# Altium PCB PCB1.PcbDoc
Units mil, origin at the board's own origin, x right, y up, seen from the top; angles counter-clockwise.
Board outline 2575 x 3510 mil, 2 copper layers (Top Layer, Bottom Layer); 43 components, 55 nets, 189 pads, 0 vias.
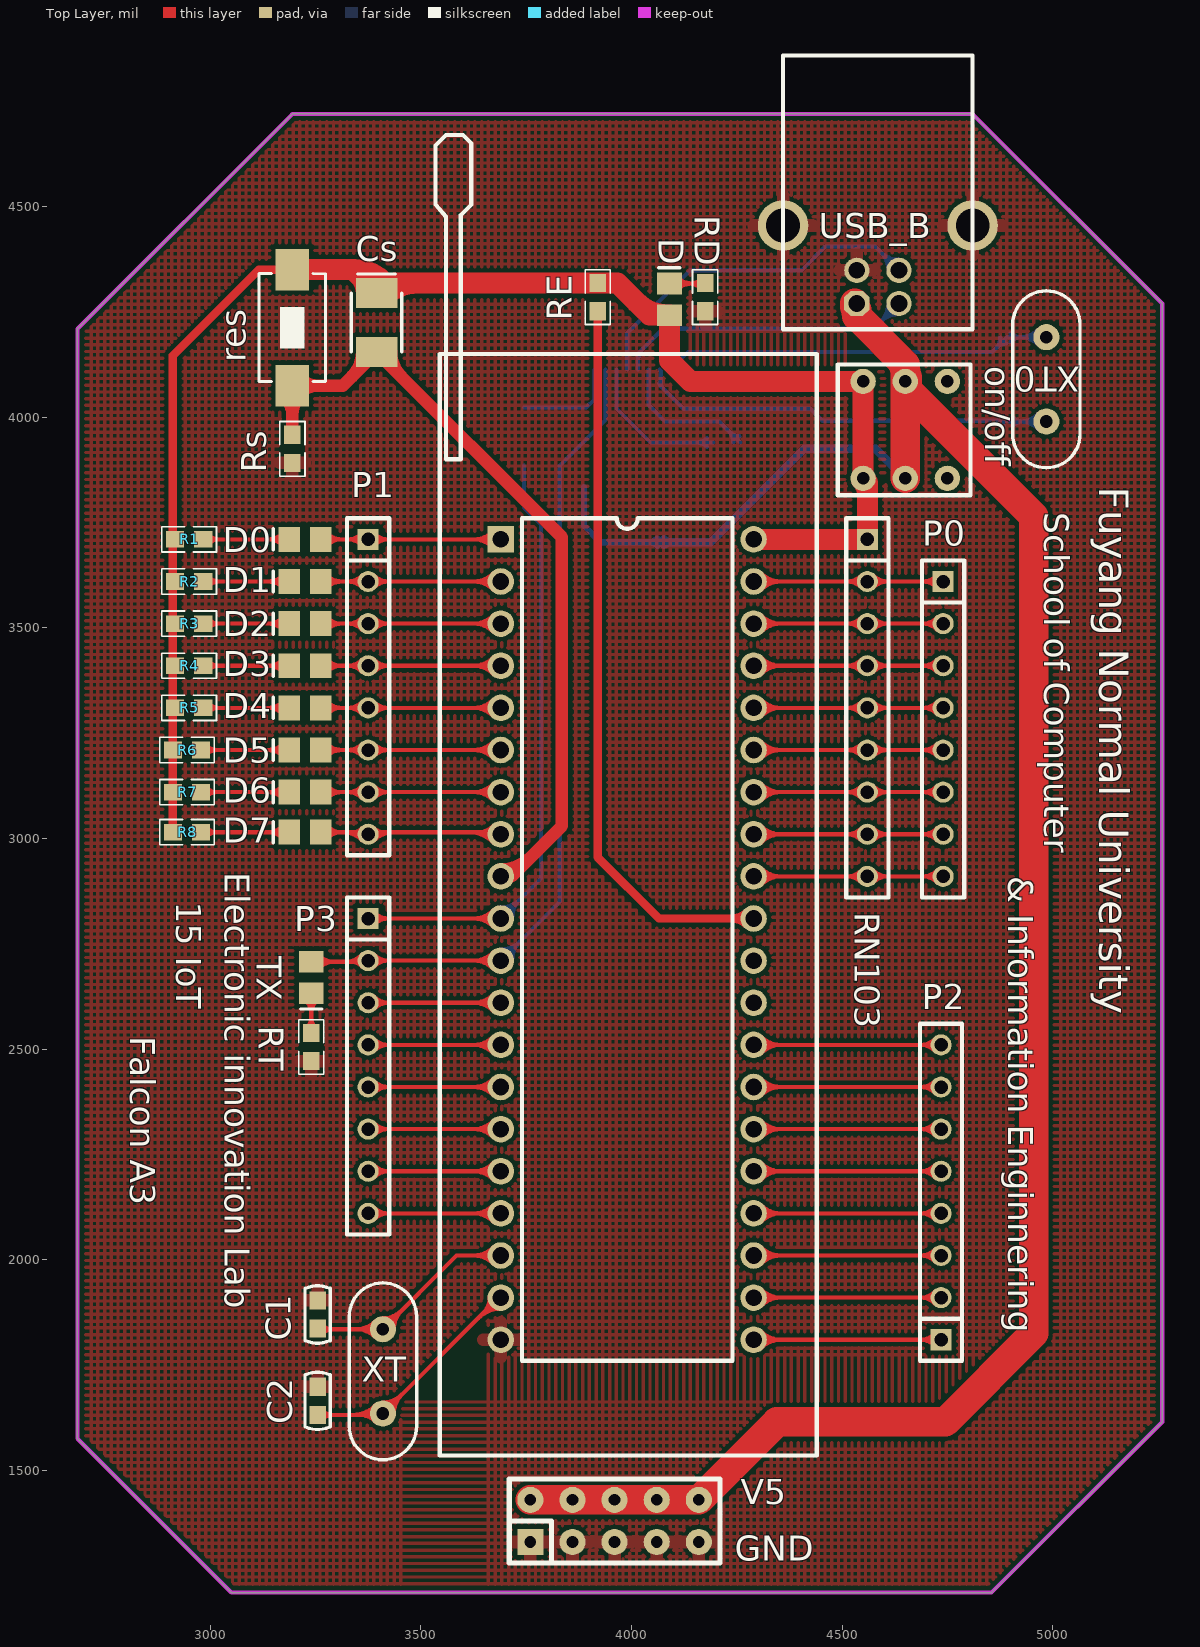
[diagram p0: Top Layer view]
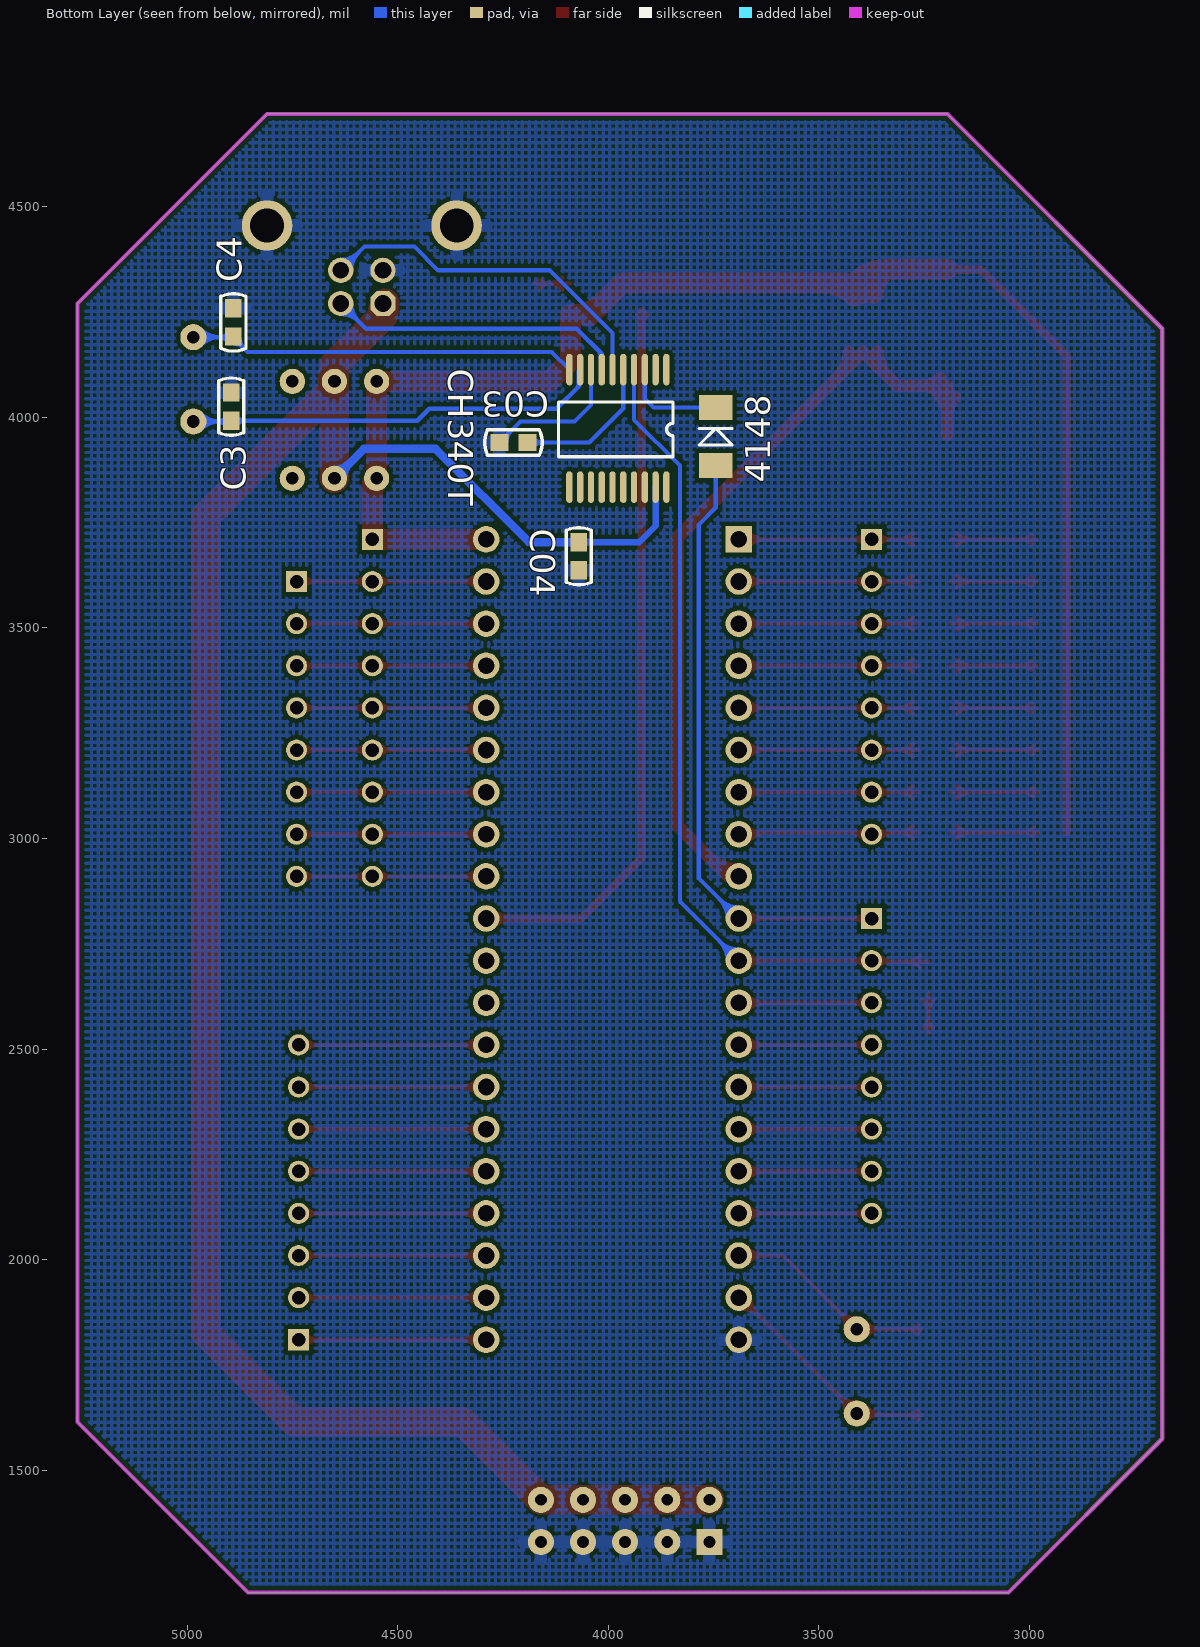
[diagram p1: Bottom Layer view, seen from below]

## Layer stack, top to bottom
Top Layer: signal copper 1.4
Dielectric: dielectric 12.6, FR-4, Dk 4.8
Bottom Layer: signal copper 1.4

## Board outline
2685,1575 2685,4210 3195,4720 4810,4720 5260,4270 5260,1615 4855,1210 3050,1210

## Design rules (kind name [scope] priority, off if disabled: settings)
Clearance [All] p1: gap=10
ComponentClearance [All] p1: gap=0 collisioncheckmode=3 verticalgap=0 showdistances=FALSE
PlaneConnect [All] p1: planeconnectstyle=Relief reliefexpansion=20 reliefentries=4 reliefconductorwidth=30 reliefairgap=10
PolygonConnect [All] p1: connectstyle=Relief reliefconductorwidth=30 reliefentries=4 polygonreliefangle="90 Angle" airgapwidth=10
RoutingVias [All] p1: holewidth=28 width=50 viastyle="Through Hole" minholewidth=28 minwidth=50 maxholewidth=28 maxwidth=50
SolderMaskExpansion [All] p1: expansion=4
Width [All] p1: maxlimit=100 minlimit=10 preferedwidth=10
26 further rules are at their usual default settings.

## Classes and differential pairs
component class Sheet1: C1 C2 C3 C03 C4 C04 CH340T Cs D D0 D1 D2 D3 D4 D5 D6 D7 on/off P0 P1 P2 P3 R1 R2 R3 R4 R5 R6 R7 R8 RD RE res RN103 Rs RT

## Components (designator, comment, footprint, x,y, rotation, side; value= is the part's Value field where it differs from the comment)
4148 "Comment" DIODE-1206 3745,3885 r90 bottom
C1 "Cap" C-RAD-0603 3255,1870 r90 top
C2 "Cap" C-RAD-0603 3255,1665 r270 top
C03 "Cap" C-RAD-0603 4225,3940 r180 bottom
C3 "Cap" C-RAD-0603 4895,4025 r90 bottom
C04 "Cap" C-RAD-0603 4070,3670 r90 bottom
C4 "Cap" C-RAD-0603 4890,4225 r90 bottom
CH340T "CH340H" SSOP20 3945,3940 r270 bottom
Cs "Cap Pol" CAP-3528 3395,4225 r270 top
D "LED0" LED_0805 4090,4280 r90 top
D0 "LED0" LED_0805 3225,3710 r180 top
D1 "LED0" LED_0805 3225,3610 r180 top
D2 "LED0" LED_0805 3225,3510 r180 top
D3 "LED0" LED_0805 3225,3410 r180 top
D4 "LED0" LED_0805 3225,3310 r180 top
D5 "LED0" LED_0805 3225,3210 r180 top
D6 "LED0" LED_0805 3225,3110 r180 top
D7 "LED0" LED_0805 3225,3015 r180 top
on/off "HEADER 3X2" 自锁按键 4555,4085 r270 top
P0 "Header 8" SIP8 4740,3610 r270 top
P1 "Header 8" SIP8 3375,3710 r270 top
P2 "Header 8" SIP8 4735,1810 r90 top
P3 "Header 8" SIP8 3375,2810 r270 top
R1 "Res1" 0603-1 2950,3710 r180 top
R2 "Res1" 0603-1 2950,3610 r180 top
R3 "Res1" 0603-1 2950,3510 r180 top
R4 "Res1" 0603-1 2950,3410 r180 top
R5 "Res1" 0603-1 2950,3310 r180 top
R6 "Res1" 0603-1 2945,3210 r180 top
R7 "Res1" 0603-1 2945,3110 r180 top
R8 "Res1" 0603-1 2945,3015 r180 top
RD "Res1" 0603-1 4175,4285 r270 top
RE "Res1" 0603-1 3920,4285 r90 top
res "SW-PB" SW_PB2_A1 3195,4215 r180 top
RN103 "CON9" SIP9 4560,3710 r270 top
Rs "Res1" 0603-1 3195,3925 r90 top
RT "Res1" 0603-1 3240,2505 r270 top
TX "LED0" LED_0805 3240,2670 r270 top
USB_B "USB" USB_B1 4535,4270 r90 top
V5 "Comment" IDC10 3760,1330 r0 top
XT "XT" HC-49S 3410,1635 r90 top
XT0 "XT" HC-49S 4985,4190 r270 top
? "89C52" DIP40Plv 4290,1810 r90 top

## Footprints (in the part's own frame and the unit in brackets; to place one, negate y for a bottom-side part, rotate by r counter-clockwise, add the part's x,y. Pads: shape width x height; smd on the part's side, far side on the other; paste and mask are expansions set on the pad)
0603-1 [mm] "贴片带丝印"
  rect 1.1x1 smd: 1(-0.85,0) 2(0.85,0)
  silkscreen extent -1.65,-0.76 1.65,0.76, body extent -1.14,-0.38 1.14,0.38, height 1
C-RAD-0603 [mm] "贴片电容"
  rect 1.1x1 smd: 1(-0.85,0) 2(0.85,0)
  silkscreen extent -1.73,-0.76 1.73,0.76, body extent -1.14,-0.38 1.14,0.38, height 1
CAP-3528 [mm] "钽电容"
  rect 1.8x2.5 smd: 1(-1.778,0) 2(1.778,0)
  silkscreen extent -2.92,-1.52 1.78,1.52, body extent -1.91,-1.4 1.91,1.4, height 1.1
DIODE-1206 [mm] "玻璃封装二极管"
  rect 1.5x2 smd: 1(0,0) 2(3.5,0)
  silkscreen extent 1.25,-1 2.25,1
DIP40Plv [mm]
  rect 1.6x1.6 hole 1: 1(48.26,15.24)
  round 1.6 hole 1: 2(45.72,15.24) 3(43.18,15.24) 4(40.64,15.24) 5(38.1,15.24) 6(35.56,15.24) 7(33.02,15.24) 8(30.48,15.24) 9(27.94,15.24) 10(25.4,15.24) 11(22.86,15.24) 12(20.32,15.24) 13(17.78,15.24) 14(15.24,15.24) 15(12.7,15.24) 16(10.16,15.24) 17(7.62,15.24) 18(5.08,15.24) 19(2.54,15.24) 20(0,15.24) 21(0,0) 22(2.54,0) 23(5.08,0) 24(7.62,0) 25(10.16,0) 26(12.7,0) 27(15.24,0) 28(17.78,0) 29(20.32,0) 30(22.86,0) 31(25.4,0) 32(27.94,0) 33(30.48,0) 34(33.02,0) 35(35.56,0) 36(38.1,0) 37(40.64,0) 38(43.18,0) 39(45.72,0) 40(48.26,0)
  silkscreen extent -6.99,-3.81 72.64,19.18
HC-49S [mil]
  round 62 hole 30: 1(0,0) 2(200,0)
  silkscreen extent -110,-80 310,80
IDC10 [mil]
  rect 62x62 hole 28: 1(0,0)
  round 62 hole 28: 2(0,100) 3(100,0) 4(100,100) 5(200,0) 6(200,100) 7(300,0) 8(300,100) 9(400,0) 10(400,100)
  silkscreen extent -50,-50 450,150
LED_0805 [mm] "贴片二极管"
  rect 1.3x1.5 smd: 1(-0.95,0) 2(0.95,0)
  silkscreen extent 1.91,-0.63 1.91,0.64
SIP8 [mil]
  rect 50x50 hole 32: 1(0,0)
  round 50 hole 32: 2(100,0) 3(200,0) 4(300,0) 5(400,0) 6(500,0) 7(600,0) 8(700,0)
  silkscreen extent -50,-50 750,50
SIP9 [mil]
  rect 50x50 hole 32: 1(0,0)
  round 50 hole 32: 2(100,0) 3(200,0) 4(300,0) 5(400,0) 6(500,0) 7(600,0) 8(700,0) 9(800,0)
  silkscreen extent -50,-50 850,50
SSOP20 [mil]
  oval 75x14.96 smd: 1(-173,83) 2(-173,57.41) 3(-173,31.82) 4(-173,6.23) 5(-173,-19.36) 6(-173,-44.95) 7(-173,-70.54) 8(-173,-96.14) 9(-173,-121.72) 10(-173,-147.32) 11(106,-147.32) 12(106,-121.72) 13(106,-96.14) 14(106,-70.54) 15(106,-44.95) 16(106,-19.36) 17(106,6.23) 18(106,31.82) 19(106,57.41) 20(106,83)
  silkscreen extent -96,-173 34,99
SW_PB2_A1 [mm]
  rect 2x2.5 smd: 1(0,3.556) 2(0,-3.444)
  silkscreen extent -2,-3.19 2,3.31, body extent -2.03,-3.18 2.03,3.3, height 1.2
USB_B1 [mil] "USB方孔"
  oct 60x60 hole 40: 1(0,0)
  round 60 hole 40: 2(0,-100) 3(78.74,-100) 4(78.74,0)
  round 120 hole 80: 5(185.04,175) 6(185.04,-275)
  silkscreen extent -61,-275 589,175
自锁按键 [mil]
  round 60 hole 30: 0(0,195) 0(230,195) 1(0,95) 1(230,95) 2(0,-5) 2(230,-5)
  silkscreen extent -40,-65 270,250

## Part data
C1 C2 C03 C3 C04 C4: "无极性电容"
CH340T: "USB to TTL Serial / UART,  USB to IrDA"
Cs: "极性电解电容"
D D0 D1 D2 D3 D4 D5 D6 D7 TX: "发光二极管"
P0 P1 P2 P3: "Header, 8-Pin"
R1 R2 R3 R4 R5 R6 R7 R8 RD RE Rs RT: "贴片电阻"
res: "微动开关"
RN103: "Connector"
USB_B: "USB接口"
XT XT0: "晶振"

## Nets (pads, with @x,y where several pads share a name; then routed paths per layer and width w, separated by ;. In a path a pad name is that pad's centre, name@x,y a point inside that pad or via, vN(x,y) a via of type N, cw(c..) or ccw(c..) an arc to the next point about the centre after c; other vN are vias at no path point)
D+: CH340T.6 USB_B.3 | length 991.9
  Bottom Layer w10: CH340T.6 3989.95,4199.95 4138.74,4348.74 4403.74,4348.74 4460,4405 4578.74,4405 USB_B.3 ; USB_B.3@4610,4348.74 ccw(c4549.64,4348.74) 4592.32,4391.42 ccw(c4635,4434.1) USB_B.3@4635,4373.74 ; USB_B.3@4620,4348.74 ccw(c4583.79,4348.74) 4609.39,4374.35 ccw(c4635,4399.95) USB_B.3@4635,4363.74
D-: CH340T.7 USB_B.2 | length 877.1
  Bottom Layer w10: CH340T.7 4015.54,4150.54 4075,4210 4575,4210 USB_B.2 ; CH340T.7@4018.02,4143.02 cw(c4042.18,4143.02) 4025.1,4160.1 ; USB_B.2@4610,4270 cw(c4549.64,4270) 4592.32,4227.32 cw(c4635,4184.64) USB_B.2@4635,4245 ; USB_B.2@4620,4270 cw(c4583.79,4270) 4609.39,4244.39 cw(c4635,4218.79) USB_B.2@4635,4255
GND: ?.20 C1.2 C2.1 C03.1 C3.2 C04.1 C4.2 CH340T.8 RD.2 Rs.1 RT.2 USB_B.4 USB_B.5 USB_B.6 V5.1 V5.3 V5.5 V5.7 V5.9 | length 394
  Bottom Layer w10: CH340T.8 4041.14,4028.86 4080,3990 4208.46,3990 C03.1 ; 4230.04,3968.43 cw(c4201.61,3940) C03.1@4241.81,3940 ; 4234.79,3963.68 ccw(c4256.5,3985.39) C03.1@4256.5,3954.68
Net_9: ?.9 Cs.2 res.1 Rs.2 | length 2244.9
  Top Layer w30: res.1@3177.77,4047.93 cw(c3136.17,4006.32) 3195,4006.32 cw(c3253.83,4006.32) res.1@3212.23,4047.93 ; Rs.2 res.1 3315,4075 Cs.2 3835,3715 3835,3030 3715,2910 ?.9 ; res.1@3212.23,4057.77 cw(c3253.83,4016.17) 3253.83,4075 cw(c3253.83,4133.83) res.1@3212.23,4092.23 ; 3336.6,4096.6 ccw(c3278.19,4155) Cs.2@3360.79,4155 ; Cs.2@3429.21,4155 ccw(c3511.81,4155) 3453.4,4096.6 ; ?.9@3690,2926.5 ccw(c3690,3026.68) 3760.84,2955.84
Net_18: ?.18 C1.1 XT.2 | length 1043.2
  Top Layer w10: C1.1@3256.54,1835 XT.2 3585,2010 ?.18 ; C1.1@3265.38,1824.18 cw(c3291.5,1798.07) 3291.5,1835 ; C1.1@3265.38,1844.95 ccw(c3289.41,1868.97) 3289.41,1835 ; XT.2@3391.62,1816.62 ccw(c3347.23,1772.23) 3347.23,1835 ccw(c3347.23,1897.77) XT.2@3391.62,1853.38 ; XT.2@3398.69,1823.69 ccw(c3371.37,1796.37) 3371.37,1835 ccw(c3371.37,1873.63) XT.2@3398.69,1846.31 ; XT.2@3410,1851 ccw(c3410,1889.63) 3437.31,1862.31 ccw(c3464.63,1835) XT.2@3426,1835 ; XT.2@3410,1861 ccw(c3410,1923.77) 3454.38,1879.38 ccw(c3498.77,1835) XT.2@3436,1835 ; ?.18@3671.26,1991.26 ccw(c3626.03,1946.03) 3626.03,2010 ccw(c3626.03,2073.97) ?.18@3671.26,2028.74 ; ?.18@3678.34,1998.34 ccw(c3650.18,1970.18) 3650.18,2010 ccw(c3650.18,2049.82) ?.18@3678.34,2021.66
Net_19: ?.19 C2.2 XT.1 | length 1039.9
  Top Layer w10: C2.2 XT.1@3406.54,1631.54 ; C2.2@3265.38,1621.15 cw(c3290.45,1596.08) 3290.45,1631.54 cw(c3290.45,1666.99) C2.2@3265.38,1641.92 ; 3338.87,1631.54 ccw(c3338.87,1706.13) XT.1@3391.62,1653.38 ; 3355.59,1631.54 cw(c3355.59,1580.59) XT.1@3391.62,1616.62 ; 3363.01,1631.54 ccw(c3363.01,1681.99) XT.1@3398.69,1646.31 ; XT.1 3685,1910 ?.19 ; XT.1@3410,1651 ccw(c3410,1689.63) 3437.31,1662.31 ccw(c3464.63,1635) XT.1@3426,1635 ; XT.1@3410,1661 ccw(c3410,1723.77) 3454.38,1679.38 ccw(c3498.77,1635) XT.1@3436,1635 ; 3636.23,1861.23 cw(c3690,1807.47) ?.19@3690,1883.5 ; 3648.3,1873.3 ccw(c3611.61,1910) ?.19@3663.5,1910 ; 3653.3,1878.3 cw(c3690,1841.61) ?.19@3690,1893.5
Net_31: ?.31 RE.1 | length 1844.8
  Top Layer w20: RE.1@3913.15,4242.72 cw(c3896.62,4226.19) 3920,4226.19 cw(c3943.38,4226.19) RE.1@3926.85,4242.72 ; RE.1 3920,2955 4065,2810 ?.31 ; ?.31@4274.8,2794.8 ccw(c4238.1,2758.1) 4238.1,2810 ccw(c4238.1,2861.9) ?.31@4274.8,2825.2
NetC3_1: C3.1 CH340T.9 XT0.2 | length 1293.4
  Bottom Layer w10: CH340T.9@4065.46,4080.85 cw(c4060.9,4073.16) 4069.84,4073.16 ; CH340T.9 4069.84,4109.89 4069.84,4073.67 ; CH340T.9@4068.85,4081.7 ccw(c4074.48,4078.32) 4069.84,4073.67 ; CH340T.9@4069.21,4082.98 ccw(c4090.17,4082.98) 4075.34,4068.16 ; C3.1@4884.62,3981.15 ccw(c4859.55,3956.08) 4859.55,3991.54 ccw(c4859.55,4026.99) C3.1@4884.62,4001.92 ; C3.1 4453.46,3991.54 4425,4020 4123.5,4020 4069.84,4073.67 ; C3.1@4896.54,3990 XT0.2 ; C3.1@4905.38,3979.18 cw(c4931.5,3953.07) 4931.5,3990 ; C3.1@4905.38,3999.95 ccw(c4929.41,4023.97) 4929.41,3990 ; XT0.2@4966.62,3971.62 ccw(c4922.23,3927.23) 4922.23,3990 ccw(c4922.23,4052.77) XT0.2@4966.62,4008.38 ; XT0.2@4973.69,3978.69 ccw(c4946.37,3951.37) 4946.37,3990 ccw(c4946.37,4028.63) XT0.2@4973.69,4001.31
NetC03_2: C03.2 CH340T.5 | length 412.1
  Bottom Layer w10: CH340T.5 3964.36,4020.64 4045,3940 C03.2@4195,3940 ; C03.2@4179.18,3929.62 ccw(c4154.11,3904.55) 4154.11,3940 ccw(c4154.11,3975.45) C03.2@4179.18,3950.38
NetC4_1: C4.1 CH340T.10 XT0.1 | length 1195.2
  Bottom Layer w10: CH340T.10 4134.32,4155 4856.54,4155 4891.54,4190 XT0.1 ; 4864.15,4162.62 ccw(c4837.2,4189.57) C4.1@4875.32,4189.57 ; 4866.81,4165.28 cw(c4890,4142.09) C4.1@4890,4174.88 ; C4.1@4900.38,4179.18 cw(c4926.5,4153.07) 4926.5,4190 ; C4.1@4900.38,4199.95 ccw(c4924.41,4223.97) 4924.41,4190 ; XT0.1@4966.62,4171.62 ccw(c4922.23,4127.23) 4922.23,4190 ccw(c4922.23,4252.77) XT0.1@4966.62,4208.38 ; XT0.1@4973.69,4178.69 ccw(c4946.37,4151.37) 4946.37,4190 ccw(c4946.37,4228.63) XT0.1@4973.69,4201.31
NetD0_2: D0.2 R1.1 | length 337.9
  Top Layer w10: R1.1 D0.2 ; R1.1@2995.82,3699.62 cw(c3020.89,3674.55) 3020.89,3710 cw(c3020.89,3745.45) R1.1@2995.82,3720.38 ; D0.2@3173.04,3695.44 ccw(c3137.89,3660.29) 3137.89,3710 ccw(c3137.89,3759.71) D0.2@3173.04,3724.56
NetD1_2: D1.2 R2.1 | length 337.9
  Top Layer w10: R2.1 D1.2 ; R2.1@2995.82,3599.62 cw(c3020.89,3574.55) 3020.89,3610 cw(c3020.89,3645.45) R2.1@2995.82,3620.38 ; D1.2@3173.04,3595.44 ccw(c3137.89,3560.29) 3137.89,3610 ccw(c3137.89,3659.71) D1.2@3173.04,3624.56
NetD2_2: D2.2 R3.1 | length 337.9
  Top Layer w10: R3.1 D2.2 ; R3.1@2995.82,3499.62 cw(c3020.89,3474.55) 3020.89,3510 cw(c3020.89,3545.45) R3.1@2995.82,3520.38 ; D2.2@3173.04,3495.44 ccw(c3137.89,3460.29) 3137.89,3510 ccw(c3137.89,3559.71) D2.2@3173.04,3524.56
NetD3_2: D3.2 R4.1 | length 337.9
  Top Layer w10: R4.1 D3.2 ; R4.1@2995.82,3399.62 cw(c3020.89,3374.55) 3020.89,3410 cw(c3020.89,3445.45) R4.1@2995.82,3420.38 ; D3.2@3173.04,3395.44 ccw(c3137.89,3360.29) 3137.89,3410 ccw(c3137.89,3459.71) D3.2@3173.04,3424.56
NetD4_2: D4.2 R5.1 | length 337.9
  Top Layer w10: R5.1 D4.2 ; R5.1@2995.82,3299.62 cw(c3020.89,3274.55) 3020.89,3310 cw(c3020.89,3345.45) R5.1@2995.82,3320.38 ; D4.2@3173.04,3295.44 ccw(c3137.89,3260.29) 3137.89,3310 ccw(c3137.89,3359.71) D4.2@3173.04,3324.56
NetD5_2: D5.2 R6.1 | length 342.9
  Top Layer w10: R6.1 D5.2 ; R6.1@2990.82,3199.62 cw(c3015.89,3174.55) 3015.89,3210 cw(c3015.89,3245.45) R6.1@2990.82,3220.38 ; D5.2@3173.04,3195.44 ccw(c3137.89,3160.29) 3137.89,3210 ccw(c3137.89,3259.71) D5.2@3173.04,3224.56
NetD6_2: D6.2 R7.1 | length 342.9
  Top Layer w10: R7.1 D6.2 ; R7.1@2990.82,3099.62 cw(c3015.89,3074.55) 3015.89,3110 cw(c3015.89,3145.45) R7.1@2990.82,3120.38 ; D6.2@3173.04,3095.44 ccw(c3137.89,3060.29) 3137.89,3110 ccw(c3137.89,3159.71) D6.2@3173.04,3124.56
NetD7_2: D7.2 R8.1 | length 342.9
  Top Layer w10: R8.1 D7.2 ; R8.1@2990.82,3004.62 cw(c3015.89,2979.55) 3015.89,3015 cw(c3015.89,3050.45) R8.1@2990.82,3025.38 ; D7.2@3173.04,3000.44 ccw(c3137.89,2965.29) 3137.89,3015 ccw(c3137.89,3064.71) D7.2@3173.04,3029.56
NetD_2: D.2 RD.1 | length 219.2
  Top Layer w10: D.2 4173.94,4317.4 RD.1 ; D.2@4108.5,4302.84 cw(c4143.65,4267.69) 4143.65,4317.4 cw(c4143.65,4367.11) D.2@4108.5,4331.96 ; 4137.36,4317.4 cw(c4137.36,4278.86) RD.1@4164.62,4306.11 ; 4141.73,4317.4 ccw(c4141.73,4349.76) RD.1@4164.62,4326.88
NetRT_1: RT.1 TX.2 | length 227.9
  Top Layer w10: TX.2@3225.44,2618.04 cw(c3190.29,2582.89) 3240,2582.89 cw(c3289.71,2582.89) TX.2@3254.56,2618.04 ; RT.1@3229.62,2550.82 ccw(c3204.55,2575.89) 3240,2575.89 ccw(c3275.45,2575.89) RT.1@3250.38,2550.82 ; RT.1 TX.2
P00: ?.39 P0.1 RN103.2 | length 840.6
  Top Layer w10: ?.39 RN103.2 P0.1 ; ?.39@4301.66,3598.34 cw(c4329.82,3570.18) 4329.82,3610 cw(c4329.82,3649.82) ?.39@4301.66,3621.66 ; ?.39@4308.74,3591.26 cw(c4353.97,3546.03) 4353.97,3610 cw(c4353.97,3673.97) ?.39@4308.74,3628.74 ; RN103.2@4545.86,3595.86 ccw(c4511.72,3561.72) 4511.72,3610 ccw(c4511.72,3658.28) RN103.2@4545.86,3624.14 ; RN103.2@4574.14,3595.86 cw(c4608.28,3561.72) 4608.28,3610 cw(c4608.28,3658.28) RN103.2@4574.14,3624.14 ; P0.1@4725.86,3595.86 ccw(c4691.72,3561.72) 4691.72,3610 ccw(c4691.72,3658.28) P0.1@4725.86,3624.14
P01: ?.38 P0.2 RN103.3 | length 840.6
  Top Layer w10: ?.38 RN103.3 P0.2 ; ?.38@4301.66,3498.34 cw(c4329.82,3470.18) 4329.82,3510 cw(c4329.82,3549.82) ?.38@4301.66,3521.66 ; ?.38@4308.74,3491.26 cw(c4353.97,3446.03) 4353.97,3510 cw(c4353.97,3573.97) ?.38@4308.74,3528.74 ; RN103.3@4545.86,3495.86 ccw(c4511.72,3461.72) 4511.72,3510 ccw(c4511.72,3558.28) RN103.3@4545.86,3524.14 ; RN103.3@4574.14,3495.86 cw(c4608.28,3461.72) 4608.28,3510 cw(c4608.28,3558.28) RN103.3@4574.14,3524.14 ; P0.2@4725.86,3495.86 ccw(c4691.72,3461.72) 4691.72,3510 ccw(c4691.72,3558.28) P0.2@4725.86,3524.14
P02: ?.37 P0.3 RN103.4 | length 840.6
  Top Layer w10: ?.37 RN103.4 P0.3 ; ?.37@4301.66,3398.34 cw(c4329.82,3370.18) 4329.82,3410 cw(c4329.82,3449.82) ?.37@4301.66,3421.66 ; ?.37@4308.74,3391.26 cw(c4353.97,3346.03) 4353.97,3410 cw(c4353.97,3473.97) ?.37@4308.74,3428.74 ; RN103.4@4545.86,3395.86 ccw(c4511.72,3361.72) 4511.72,3410 ccw(c4511.72,3458.28) RN103.4@4545.86,3424.14 ; RN103.4@4574.14,3395.86 cw(c4608.28,3361.72) 4608.28,3410 cw(c4608.28,3458.28) RN103.4@4574.14,3424.14 ; P0.3@4725.86,3395.86 ccw(c4691.72,3361.72) 4691.72,3410 ccw(c4691.72,3458.28) P0.3@4725.86,3424.14
P03: ?.36 P0.4 RN103.5 | length 840.6
  Top Layer w10: ?.36 RN103.5 P0.4 ; ?.36@4301.66,3298.34 cw(c4329.82,3270.18) 4329.82,3310 cw(c4329.82,3349.82) ?.36@4301.66,3321.66 ; ?.36@4308.74,3291.26 cw(c4353.97,3246.03) 4353.97,3310 cw(c4353.97,3373.97) ?.36@4308.74,3328.74 ; RN103.5@4545.86,3295.86 ccw(c4511.72,3261.72) 4511.72,3310 ccw(c4511.72,3358.28) RN103.5@4545.86,3324.14 ; RN103.5@4574.14,3295.86 cw(c4608.28,3261.72) 4608.28,3310 cw(c4608.28,3358.28) RN103.5@4574.14,3324.14 ; P0.4@4725.86,3295.86 ccw(c4691.72,3261.72) 4691.72,3310 ccw(c4691.72,3358.28) P0.4@4725.86,3324.14
P04: ?.35 P0.5 RN103.6 | length 840.6
  Top Layer w10: ?.35 RN103.6 P0.5 ; ?.35@4301.66,3198.34 cw(c4329.82,3170.18) 4329.82,3210 cw(c4329.82,3249.82) ?.35@4301.66,3221.66 ; ?.35@4308.74,3191.26 cw(c4353.97,3146.03) 4353.97,3210 cw(c4353.97,3273.97) ?.35@4308.74,3228.74 ; RN103.6@4545.86,3195.86 ccw(c4511.72,3161.72) 4511.72,3210 ccw(c4511.72,3258.28) RN103.6@4545.86,3224.14 ; RN103.6@4574.14,3195.86 cw(c4608.28,3161.72) 4608.28,3210 cw(c4608.28,3258.28) RN103.6@4574.14,3224.14 ; P0.5@4725.86,3195.86 ccw(c4691.72,3161.72) 4691.72,3210 ccw(c4691.72,3258.28) P0.5@4725.86,3224.14
P05: ?.34 P0.6 RN103.7 | length 840.6
  Top Layer w10: ?.34 RN103.7 P0.6 ; ?.34@4301.66,3098.34 cw(c4329.82,3070.18) 4329.82,3110 cw(c4329.82,3149.82) ?.34@4301.66,3121.66 ; ?.34@4308.74,3091.26 cw(c4353.97,3046.03) 4353.97,3110 cw(c4353.97,3173.97) ?.34@4308.74,3128.74 ; RN103.7@4545.86,3095.86 ccw(c4511.72,3061.72) 4511.72,3110 ccw(c4511.72,3158.28) RN103.7@4545.86,3124.14 ; RN103.7@4574.14,3095.86 cw(c4608.28,3061.72) 4608.28,3110 cw(c4608.28,3158.28) RN103.7@4574.14,3124.14 ; P0.6@4725.86,3095.86 ccw(c4691.72,3061.72) 4691.72,3110 ccw(c4691.72,3158.28) P0.6@4725.86,3124.14
P06: ?.33 P0.7 RN103.8 | length 840.6
  Top Layer w10: ?.33 RN103.8 P0.7 ; ?.33@4301.66,2998.34 cw(c4329.82,2970.18) 4329.82,3010 cw(c4329.82,3049.82) ?.33@4301.66,3021.66 ; ?.33@4308.74,2991.26 cw(c4353.97,2946.03) 4353.97,3010 cw(c4353.97,3073.97) ?.33@4308.74,3028.74 ; RN103.8@4545.86,2995.86 ccw(c4511.72,2961.72) 4511.72,3010 ccw(c4511.72,3058.28) RN103.8@4545.86,3024.14 ; RN103.8@4574.14,2995.86 cw(c4608.28,2961.72) 4608.28,3010 cw(c4608.28,3058.28) RN103.8@4574.14,3024.14 ; P0.7@4725.86,2995.86 ccw(c4691.72,2961.72) 4691.72,3010 ccw(c4691.72,3058.28) P0.7@4725.86,3024.14
P07: ?.32 P0.8 RN103.9 | length 840.6
  Top Layer w10: ?.32 RN103.9 P0.8 ; ?.32@4301.66,2898.34 cw(c4329.82,2870.18) 4329.82,2910 cw(c4329.82,2949.82) ?.32@4301.66,2921.66 ; ?.32@4308.74,2891.26 cw(c4353.97,2846.03) 4353.97,2910 cw(c4353.97,2973.97) ?.32@4308.74,2928.74 ; RN103.9@4545.86,2895.86 ccw(c4511.72,2861.72) 4511.72,2910 ccw(c4511.72,2958.28) RN103.9@4545.86,2924.14 ; RN103.9@4574.14,2895.86 cw(c4608.28,2861.72) 4608.28,2910 cw(c4608.28,2958.28) RN103.9@4574.14,2924.14 ; P0.8@4725.86,2895.86 ccw(c4691.72,2861.72) 4691.72,2910 ccw(c4691.72,2958.28) P0.8@4725.86,2924.14
P10: ?.1 D0.1 P1.1 | length 820.4
  Top Layer w10: D0.1 P1.1 ?.1 ; D0.1@3276.96,3695.44 cw(c3312.11,3660.29) 3312.11,3710 cw(c3312.11,3759.71) D0.1@3276.96,3724.56 ; P1.1@3360.86,3695.86 ccw(c3326.72,3661.72) 3326.72,3710 ccw(c3326.72,3758.28) P1.1@3360.86,3724.14 ; P1.1@3389.14,3695.86 cw(c3423.28,3661.72) 3423.28,3710 cw(c3423.28,3758.28) P1.1@3389.14,3724.14 ; ?.1@3671.26,3691.26 ccw(c3626.03,3646.03) 3626.03,3710 ccw(c3626.03,3773.97) ?.1@3671.26,3728.74 ; ?.1@3678.34,3698.34 ccw(c3650.18,3670.18) 3650.18,3710 ccw(c3650.18,3749.82) ?.1@3678.34,3721.66
P11: ?.2 D1.1 P1.2 | length 820.4
  Top Layer w10: D1.1 P1.2 ?.2 ; D1.1@3276.96,3595.44 cw(c3312.11,3560.29) 3312.11,3610 cw(c3312.11,3659.71) D1.1@3276.96,3624.56 ; P1.2@3360.86,3595.86 ccw(c3326.72,3561.72) 3326.72,3610 ccw(c3326.72,3658.28) P1.2@3360.86,3624.14 ; P1.2@3389.14,3595.86 cw(c3423.28,3561.72) 3423.28,3610 cw(c3423.28,3658.28) P1.2@3389.14,3624.14 ; ?.2@3671.26,3591.26 ccw(c3626.03,3546.03) 3626.03,3610 ccw(c3626.03,3673.97) ?.2@3671.26,3628.74 ; ?.2@3678.34,3598.34 ccw(c3650.18,3570.18) 3650.18,3610 ccw(c3650.18,3649.82) ?.2@3678.34,3621.66
P12: ?.3 D2.1 P1.3 | length 820.4
  Top Layer w10: D2.1 P1.3 ?.3 ; D2.1@3276.96,3495.44 cw(c3312.11,3460.29) 3312.11,3510 cw(c3312.11,3559.71) D2.1@3276.96,3524.56 ; P1.3@3360.86,3495.86 ccw(c3326.72,3461.72) 3326.72,3510 ccw(c3326.72,3558.28) P1.3@3360.86,3524.14 ; P1.3@3389.14,3495.86 cw(c3423.28,3461.72) 3423.28,3510 cw(c3423.28,3558.28) P1.3@3389.14,3524.14 ; ?.3@3671.26,3491.26 ccw(c3626.03,3446.03) 3626.03,3510 ccw(c3626.03,3573.97) ?.3@3671.26,3528.74 ; ?.3@3678.34,3498.34 ccw(c3650.18,3470.18) 3650.18,3510 ccw(c3650.18,3549.82) ?.3@3678.34,3521.66
P13: ?.4 D3.1 P1.4 | length 820.4
  Top Layer w10: D3.1 P1.4 ?.4 ; D3.1@3276.96,3395.44 cw(c3312.11,3360.29) 3312.11,3410 cw(c3312.11,3459.71) D3.1@3276.96,3424.56 ; P1.4@3360.86,3395.86 ccw(c3326.72,3361.72) 3326.72,3410 ccw(c3326.72,3458.28) P1.4@3360.86,3424.14 ; P1.4@3389.14,3395.86 cw(c3423.28,3361.72) 3423.28,3410 cw(c3423.28,3458.28) P1.4@3389.14,3424.14 ; ?.4@3671.26,3391.26 ccw(c3626.03,3346.03) 3626.03,3410 ccw(c3626.03,3473.97) ?.4@3671.26,3428.74 ; ?.4@3678.34,3398.34 ccw(c3650.18,3370.18) 3650.18,3410 ccw(c3650.18,3449.82) ?.4@3678.34,3421.66
P14: ?.5 D4.1 P1.5 | length 820.4
  Top Layer w10: D4.1 P1.5 ?.5 ; D4.1@3276.96,3295.44 cw(c3312.11,3260.29) 3312.11,3310 cw(c3312.11,3359.71) D4.1@3276.96,3324.56 ; P1.5@3360.86,3295.86 ccw(c3326.72,3261.72) 3326.72,3310 ccw(c3326.72,3358.28) P1.5@3360.86,3324.14 ; P1.5@3389.14,3295.86 cw(c3423.28,3261.72) 3423.28,3310 cw(c3423.28,3358.28) P1.5@3389.14,3324.14 ; ?.5@3671.26,3291.26 ccw(c3626.03,3246.03) 3626.03,3310 ccw(c3626.03,3373.97) ?.5@3671.26,3328.74 ; ?.5@3678.34,3298.34 ccw(c3650.18,3270.18) 3650.18,3310 ccw(c3650.18,3349.82) ?.5@3678.34,3321.66
P15: ?.6 D5.1 P1.6 | length 820.4
  Top Layer w10: D5.1 P1.6 ?.6 ; D5.1@3276.96,3195.44 cw(c3312.11,3160.29) 3312.11,3210 cw(c3312.11,3259.71) D5.1@3276.96,3224.56 ; P1.6@3360.86,3195.86 ccw(c3326.72,3161.72) 3326.72,3210 ccw(c3326.72,3258.28) P1.6@3360.86,3224.14 ; P1.6@3389.14,3195.86 cw(c3423.28,3161.72) 3423.28,3210 cw(c3423.28,3258.28) P1.6@3389.14,3224.14 ; ?.6@3671.26,3191.26 ccw(c3626.03,3146.03) 3626.03,3210 ccw(c3626.03,3273.97) ?.6@3671.26,3228.74 ; ?.6@3678.34,3198.34 ccw(c3650.18,3170.18) 3650.18,3210 ccw(c3650.18,3249.82) ?.6@3678.34,3221.66
P16: ?.7 D6.1 P1.7 | length 820.4
  Top Layer w10: D6.1 P1.7 ?.7 ; D6.1@3276.96,3095.44 cw(c3312.11,3060.29) 3312.11,3110 cw(c3312.11,3159.71) D6.1@3276.96,3124.56 ; P1.7@3360.86,3095.86 ccw(c3326.72,3061.72) 3326.72,3110 ccw(c3326.72,3158.28) P1.7@3360.86,3124.14 ; P1.7@3389.14,3095.86 cw(c3423.28,3061.72) 3423.28,3110 cw(c3423.28,3158.28) P1.7@3389.14,3124.14 ; ?.7@3671.26,3091.26 ccw(c3626.03,3046.03) 3626.03,3110 ccw(c3626.03,3173.97) ?.7@3671.26,3128.74 ; ?.7@3678.34,3098.34 ccw(c3650.18,3070.18) 3650.18,3110 ccw(c3650.18,3149.82) ?.7@3678.34,3121.66
P17: ?.8 D7.1 P1.8 | length 862.3
  Top Layer w10: D7.1 ?.8@3685,3015 ; D7.1@3276.96,3000.44 cw(c3312.11,2965.29) 3312.11,3015 cw(c3312.11,3064.71) D7.1@3276.96,3029.56 ; 3314.64,3015 cw(c3314.64,2949.64) P1.8@3360.86,2995.86 ; P1.8@3360.86,3024.14 cw(c3338.79,3046.21) 3338.79,3015 cw(c3338.79,2973.79) P1.8@3367.93,3002.93 ; P1.8@3382.07,3002.93 cw(c3411.21,2973.79) 3411.21,3015 cw(c3411.21,3046.21) P1.8@3389.14,3024.14 ; P1.8@3389.14,2995.86 cw(c3435.36,2949.64) 3435.36,3015 ; 3613.96,3015 cw(c3613.96,2933.96) ?.8@3671.26,2991.26 ; ?.8@3671.26,3028.74 cw(c3638.1,3061.9) 3638.1,3015 cw(c3638.1,2958.1) ?.8@3678.34,2998.34
P20: ?.21 P2.1 | length 683.9
  Top Layer w10: ?.21 P2.1 ; ?.21@4301.66,1798.34 cw(c4329.82,1770.18) 4329.82,1810 cw(c4329.82,1849.82) ?.21@4301.66,1821.66 ; ?.21@4308.74,1791.26 cw(c4353.97,1746.03) 4353.97,1810 cw(c4353.97,1873.97) ?.21@4308.74,1828.74 ; P2.1@4720.86,1795.86 ccw(c4686.72,1761.72) 4686.72,1810 ccw(c4686.72,1858.28) P2.1@4720.86,1824.14
P21: ?.22 P2.2 | length 683.9
  Top Layer w10: ?.22 P2.2 ; ?.22@4301.66,1898.34 cw(c4329.82,1870.18) 4329.82,1910 cw(c4329.82,1949.82) ?.22@4301.66,1921.66 ; ?.22@4308.74,1891.26 cw(c4353.97,1846.03) 4353.97,1910 cw(c4353.97,1973.97) ?.22@4308.74,1928.74 ; P2.2@4720.86,1895.86 ccw(c4686.72,1861.72) 4686.72,1910 ccw(c4686.72,1958.28) P2.2@4720.86,1924.14
P22: ?.23 P2.3 | length 683.9
  Top Layer w10: ?.23 P2.3 ; ?.23@4301.66,1998.34 cw(c4329.82,1970.18) 4329.82,2010 cw(c4329.82,2049.82) ?.23@4301.66,2021.66 ; ?.23@4308.74,1991.26 cw(c4353.97,1946.03) 4353.97,2010 cw(c4353.97,2073.97) ?.23@4308.74,2028.74 ; P2.3@4720.86,1995.86 ccw(c4686.72,1961.72) 4686.72,2010 ccw(c4686.72,2058.28) P2.3@4720.86,2024.14
P23: ?.24 P2.4 | length 683.9
  Top Layer w10: ?.24 P2.4 ; ?.24@4301.66,2098.34 cw(c4329.82,2070.18) 4329.82,2110 cw(c4329.82,2149.82) ?.24@4301.66,2121.66 ; ?.24@4308.74,2091.26 cw(c4353.97,2046.03) 4353.97,2110 cw(c4353.97,2173.97) ?.24@4308.74,2128.74 ; P2.4@4720.86,2095.86 ccw(c4686.72,2061.72) 4686.72,2110 ccw(c4686.72,2158.28) P2.4@4720.86,2124.14
P24: ?.25 P2.5 | length 683.9
  Top Layer w10: ?.25 P2.5 ; ?.25@4301.66,2198.34 cw(c4329.82,2170.18) 4329.82,2210 cw(c4329.82,2249.82) ?.25@4301.66,2221.66 ; ?.25@4308.74,2191.26 cw(c4353.97,2146.03) 4353.97,2210 cw(c4353.97,2273.97) ?.25@4308.74,2228.74 ; P2.5@4720.86,2195.86 ccw(c4686.72,2161.72) 4686.72,2210 ccw(c4686.72,2258.28) P2.5@4720.86,2224.14
P25: ?.26 P2.6 | length 683.9
  Top Layer w10: ?.26 P2.6 ; ?.26@4301.66,2298.34 cw(c4329.82,2270.18) 4329.82,2310 cw(c4329.82,2349.82) ?.26@4301.66,2321.66 ; ?.26@4308.74,2291.26 cw(c4353.97,2246.03) 4353.97,2310 cw(c4353.97,2373.97) ?.26@4308.74,2328.74 ; P2.6@4720.86,2295.86 ccw(c4686.72,2261.72) 4686.72,2310 ccw(c4686.72,2358.28) P2.6@4720.86,2324.14
P26: ?.27 P2.7 | length 683.9
  Top Layer w10: ?.27 P2.7 ; ?.27@4301.66,2398.34 cw(c4329.82,2370.18) 4329.82,2410 cw(c4329.82,2449.82) ?.27@4301.66,2421.66 ; ?.27@4308.74,2391.26 cw(c4353.97,2346.03) 4353.97,2410 cw(c4353.97,2473.97) ?.27@4308.74,2428.74 ; P2.7@4720.86,2395.86 ccw(c4686.72,2361.72) 4686.72,2410 ccw(c4686.72,2458.28) P2.7@4720.86,2424.14
P27: ?.28 P2.8 | length 683.9
  Top Layer w10: ?.28 P2.8 ; ?.28@4301.66,2498.34 cw(c4329.82,2470.18) 4329.82,2510 cw(c4329.82,2549.82) ?.28@4301.66,2521.66 ; ?.28@4308.74,2491.26 cw(c4353.97,2446.03) 4353.97,2510 cw(c4353.97,2573.97) ?.28@4308.74,2528.74 ; P2.8@4720.86,2495.86 ccw(c4686.72,2461.72) 4686.72,2510 ccw(c4686.72,2558.28) P2.8@4720.86,2524.14
P30: 4148.1 ?.10 P3.1 | length 1847.8
  Top Layer w10: P3.1 ?.10 ; P3.1@3389.14,2795.86 cw(c3423.28,2761.72) 3423.28,2810 cw(c3423.28,2858.28) P3.1@3389.14,2824.14 ; ?.10@3671.26,2791.26 ccw(c3626.03,2746.03) 3626.03,2810 ccw(c3626.03,2873.97) ?.10@3671.26,2828.74 ; ?.10@3678.34,2798.34 ccw(c3650.18,2770.18) 3650.18,2810 ccw(c3650.18,2849.82) ?.10@3678.34,2821.66
  Bottom Layer w10: ?.10 3785,2905 3785,3745 3745,3785 4148.1 ; ?.10@3690,2826.5 ccw(c3690,2866.32) 3718.16,2838.16 ccw(c3746.32,2810) ?.10@3706.5,2810 ; ?.10@3690,2836.5 ccw(c3690,2900.46) 3735.23,2855.23 ccw(c3780.46,2810) ?.10@3716.5,2810
P31: ?.11 CH340T.4 P3.2 TX.1 | length 2535.2
  Top Layer w10: TX.1 P3.2@3372.4,2707.4 ; TX.1@3258.5,2692.84 cw(c3293.65,2657.69) 3293.65,2707.4 cw(c3293.65,2757.11) TX.1@3258.5,2721.96 ; 3320.44,2707.4 ccw(c3320.44,2764.56) P3.2@3360.86,2724.14 ; 3332.99,2707.4 cw(c3332.99,2667.99) P3.2@3360.86,2695.86 ; 3344.59,2707.4 ccw(c3344.59,2740.41) P3.2@3367.93,2717.07 ; P3.2 ?.11 ; P3.2@3389.14,2695.86 cw(c3423.28,2661.72) 3423.28,2710 cw(c3423.28,2758.28) P3.2@3389.14,2724.14 ; ?.11@3671.26,2691.26 ccw(c3626.03,2646.03) 3626.03,2710 ccw(c3626.03,2773.97) ?.11@3671.26,2728.74 ; ?.11@3678.34,2698.34 ccw(c3650.18,2670.18) 3650.18,2710 ccw(c3650.18,2749.82) ?.11@3678.34,2721.66
  Bottom Layer w10: ?.11 3830,2850 3830,3885 3938.77,3993.77 CH340T.4 ; ?.11@3690,2726.5 ccw(c3690,2766.32) 3718.16,2738.16 ccw(c3746.32,2710) ?.11@3706.5,2710 ; ?.11@3690,2736.5 ccw(c3690,2800.46) 3735.23,2755.23 ccw(c3780.46,2710) ?.11@3716.5,2710
P32: ?.12 P3.3 | length 553.9
  Top Layer w10: P3.3 ?.12 ; P3.3@3389.14,2595.86 cw(c3423.28,2561.72) 3423.28,2610 cw(c3423.28,2658.28) P3.3@3389.14,2624.14 ; ?.12@3671.26,2591.26 ccw(c3626.03,2546.03) 3626.03,2610 ccw(c3626.03,2673.97) ?.12@3671.26,2628.74 ; ?.12@3678.34,2598.34 ccw(c3650.18,2570.18) 3650.18,2610 ccw(c3650.18,2649.82) ?.12@3678.34,2621.66
P33: ?.13 P3.4 | length 553.9
  Top Layer w10: P3.4 ?.13 ; P3.4@3389.14,2495.86 cw(c3423.28,2461.72) 3423.28,2510 cw(c3423.28,2558.28) P3.4@3389.14,2524.14 ; ?.13@3671.26,2491.26 ccw(c3626.03,2446.03) 3626.03,2510 ccw(c3626.03,2573.97) ?.13@3671.26,2528.74 ; ?.13@3678.34,2498.34 ccw(c3650.18,2470.18) 3650.18,2510 ccw(c3650.18,2549.82) ?.13@3678.34,2521.66
P34: ?.14 P3.5 | length 553.9
  Top Layer w10: P3.5 ?.14 ; P3.5@3389.14,2395.86 cw(c3423.28,2361.72) 3423.28,2410 cw(c3423.28,2458.28) P3.5@3389.14,2424.14 ; ?.14@3671.26,2391.26 ccw(c3626.03,2346.03) 3626.03,2410 ccw(c3626.03,2473.97) ?.14@3671.26,2428.74 ; ?.14@3678.34,2398.34 ccw(c3650.18,2370.18) 3650.18,2410 ccw(c3650.18,2449.82) ?.14@3678.34,2421.66
P35: ?.15 P3.6 | length 553.9
  Top Layer w10: P3.6 ?.15 ; P3.6@3389.14,2295.86 cw(c3423.28,2261.72) 3423.28,2310 cw(c3423.28,2358.28) P3.6@3389.14,2324.14 ; ?.15@3671.26,2291.26 ccw(c3626.03,2246.03) 3626.03,2310 ccw(c3626.03,2373.97) ?.15@3671.26,2328.74 ; ?.15@3678.34,2298.34 ccw(c3650.18,2270.18) 3650.18,2310 ccw(c3650.18,2349.82) ?.15@3678.34,2321.66
P36: ?.16 P3.7 | length 553.9
  Top Layer w10: P3.7 ?.16 ; P3.7@3389.14,2195.86 cw(c3423.28,2161.72) 3423.28,2210 cw(c3423.28,2258.28) P3.7@3389.14,2224.14 ; ?.16@3671.26,2191.26 ccw(c3626.03,2146.03) 3626.03,2210 ccw(c3626.03,2273.97) ?.16@3671.26,2228.74 ; ?.16@3678.34,2198.34 ccw(c3650.18,2170.18) 3650.18,2210 ccw(c3650.18,2249.82) ?.16@3678.34,2221.66
P37: ?.17 P3.8 | length 553.9
  Top Layer w10: P3.8 ?.17 ; P3.8@3389.14,2095.86 cw(c3423.28,2061.72) 3423.28,2110 cw(c3423.28,2158.28) P3.8@3389.14,2124.14 ; ?.17@3671.26,2091.26 ccw(c3626.03,2046.03) 3626.03,2110 ccw(c3626.03,2173.97) ?.17@3671.26,2128.74 ; ?.17@3678.34,2098.34 ccw(c3650.18,2070.18) 3650.18,2110 ccw(c3650.18,2149.82) ?.17@3678.34,2121.66
RX: 4148.2 CH340T.3 | length 246.4
  Bottom Layer w10: 4148.2 3892.8,4022.8 3913.18,4043.18 CH340T.3
V5: C04.2 CH340T.19 on/off.1 USB_B.1 V5.2 V5.4 V5.6 V5.8 V5.10 | length 5441
  Top Layer w70: V5.2 V5.10 4345,1615 4745,1615 4955,1825 4955,3765 on/off.1@4650,4070 ; USB_B.1@4530,4270 ccw(c4590.36,4270) 4547.68,4227.32 ; USB_B.1@4535,4255 4535,4240 4650,4125 4650,4085 on/off.1@4650,4070 ; 4630.25,4144.75 cw(c4570.5,4085) on/off.1@4655,4085 ; on/off.1@4650,3855 on/off.1@4650,4070
  Bottom Layer w15: CH340T.19 3887.59,3742.41 3926.54,3703.46 C04.2 ; C04.2@4061.38,3694.85 ccw(c4040.58,3674.05) 4040.58,3703.46 ccw(c4040.58,3732.88) C04.2@4061.38,3712.08
  Bottom Layer w20: C04.2 4188.46,3703.46 4410,3925 4580,3925 on/off.1@4650,3855 ; C04.2@4076.85,3696.62 cw(c4093.38,3680.08) 4093.38,3703.46 cw(c4093.38,3726.85) C04.2@4076.85,3710.31 ; on/off.1@4630,3855 ccw(c4581.72,3855) 4615.86,3889.14 ccw(c4650,3923.28) on/off.1@4650,3875
V5ON: ?.40 Cs.1 D.1 on/off.2 R1.2 R2.2 R3.2 R4.2 R5.2 R6.2 R7.2 R8.2 RE.2 res.2 RN103.1 | length 4019
  Top Layer w20: R8.2 R7.2 R6.2 2911.54,4146.54 3115.59,4350.59 res.2
  Top Layer w50: res.2 3339.41,4350.59 Cs.1 3415,4295 3438.46,4318.46 RE.2 3966.54,4318.46 4042.4,4242.6 D.1 4090,4135 4140,4085 4550,4085 4550,3855 4560,3845 RN103.1 ?.40 ; 3342.53,4350.59 cw(c3342.53,4256.31) Cs.1@3409.2,4322.98 ; 3353.67,4336.33 cw(c3312.33,4295) Cs.1@3370.79,4295 ; Cs.1@3416.16,4287.62 cw(c3490.62,4213.16) 3490.62,4318.46 ; 4010.52,4274.48 ccw(c4086.06,4350.02) D.1@4086.06,4243.19 ; on/off.2@4546.46,3851.46 cw(c4513.79,3818.79) 4560,3818.79
pads on no net: ?.29 ?.30 CH340T.1 CH340T.2 CH340T.11 CH340T.12 CH340T.13 CH340T.14 CH340T.15 CH340T.16 CH340T.17 CH340T.18 CH340T.20 on/off.0

## Polygon pours and split planes (outlines as drawn)
GND on Top Layer "Bottom Layer-No Net" (hatched 90Degree grid 15.98 track 8, remove dead copper, pour order 2): 3205,4720 4810,4720 5260,4270 5260,1615 4855,1210 3050,1210 2685,1575 2685,4210
GND on Bottom Layer "Bottom Layer-No Net" (hatched 90Degree grid 15.98 track 8, remove dead copper, pour order 4): 3195,4720 4810,4720 5260,4270 5260,1615 4855,1210 3050,1210 2685,1575 2685,4210

## Keep-outs
Keep-Out Layer:
  lines w10: 2685,1575 2685,3030 2685,4210 3195,4720 4810,4720 5260,4270 5260,1615 4855,1210 3050,1210 2685,1575

## Silkscreen, mask and mechanical layers (free items; w line width, h text height)
Top Overlay:
  text "Fuyang Normal University" at 5110,3835 h70 r270
  text "School of Computer" at 4980,3775 h60 r270
  text "Electronic innovation Lab" at 3035,2920 h60 r270
  text "& Information Enginnering" at 4895,2910 h60 r270
  text "15 IoT" at 2920,2850 h60 r270
  text "Falcon A3" at 2810,2530 h60 r270
  text "GND" at 4245,1285 h60